# Altium PCB GSM.PcbDoc (part 1 of 2)
Units mm, origin at the board's own origin, x right, y up, seen from the top; angles counter-clockwise.
Board outline 52.5 x 130 mm, 2 copper layers (Top Layer, Bottom Layer); 68 components, 56 nets, 259 pads, 68 vias.
Unrouted connection lines stored in the file: 1.
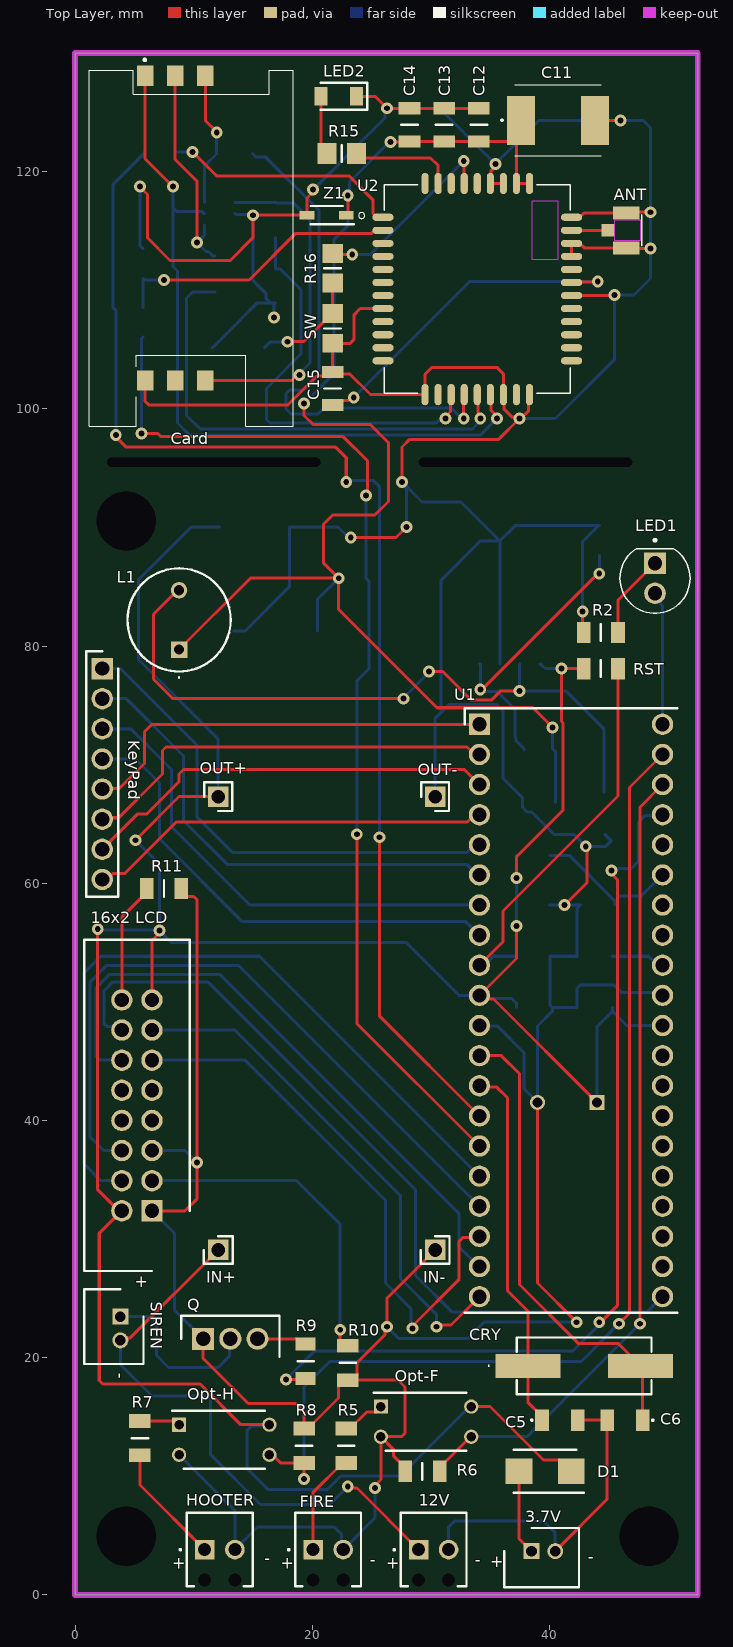
[diagram p0: Top Layer view]
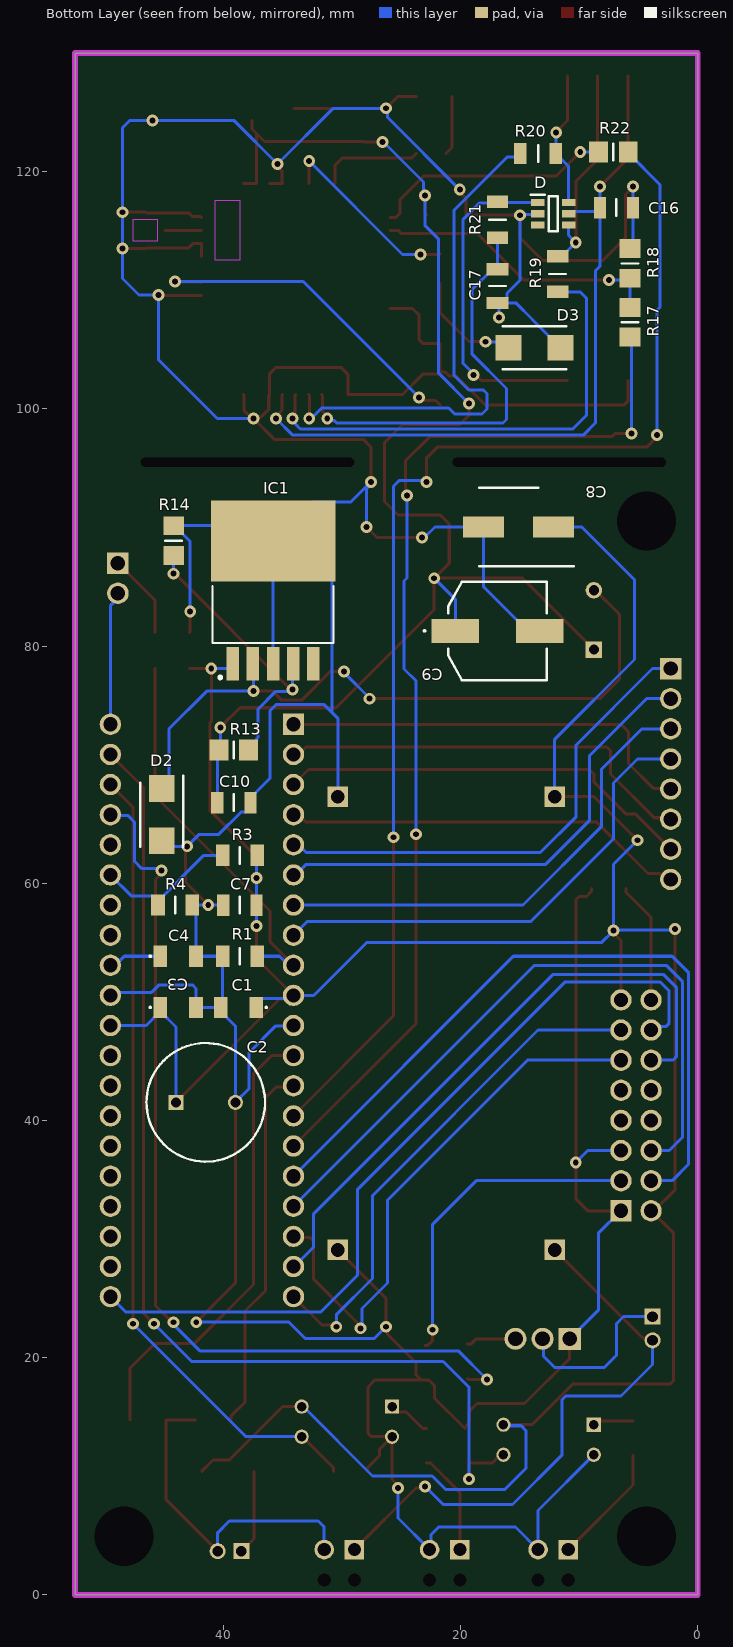
[diagram p1: Bottom Layer view, seen from below]

## Layer stack, top to bottom
Top Solder: solder mask 0.0102, Solder Resist, Dk 3.5
Top Layer: signal copper 0.0356
Dielectric 1: dielectric 0.32, FR-4, Dk 4.8
Bottom Layer: signal copper 0.0356
Bottom Solder: solder mask 0.0102, Solder Resist, Dk 3.5

## Board outline
0,0 52.5,0 52.5,130 0,130

## Design rules (kind name [scope] priority, off if disabled: settings)
Clearance [All] p1: gap=0.254 ignorepadtopadclearanceinfootprint=FALSE
PolygonConnect [All] p1: connectstyle=Relief reliefconductorwidth=0.254 reliefentries=4 polygonreliefangle="90 Angle" airgapwidth=0.254
RoutingVias [All] p1: holewidth=0.5 width=1 viastyle="Through Hole" minholewidth=0.5 minwidth=1 maxholewidth=0.5 maxwidth=1
SolderMaskExpansion [All] p1: expansion=0.102 istentingtop=FALSE
UnRoutedNet [All] p1: checkbadconnections=TRUE
Width [All] p1: maxlimit=0.254 minlimit=0.254 preferedwidth=0.254
29 further rules are at their usual default settings.

## Classes and differential pairs
component class "SIM800C SCH": ANT C7 C8 C9 C10 C11 C12 C13 C14 C15 C16 C17 Card D D2 IC1 L1 LED2 R13 R14 R15 R16 R17 R18 R19 R20 R21 R22 SW U2 Z1
component class "GSM SA Schematic": 3.7V 12V "16x2 LCD" C1 C2 C3 C4 C5 C6 CRY D1 FIRE HOOTER IN+ IN- KeyPad LED1 Opt-F Opt-H OUT+ OUT- Q R1 R2 R3 R4 R5 R6 R7 R8 R9 R10 R11 RST SIREN U1

## Components (designator, comment, footprint, x,y, rotation, side; value= is the part's Value field where it differs from the comment)
3.7V "440054-2" SHDR2W70P0X200_1X2_600X470X635P 38.481,3.683 r180 top
12V "1725656" 1725656 28.956,3.81 r0 top
"16x2 LCD" "70246-1602" SHDR16W99P254_2X8_2794X889X927P 6.477,32.385 r90 top
ANT "U.FL-R-SMT(01)" HRS_U.FL-R-SMT(01) 46.482,115.062 r270 top
C1 "100nF" C1206 38.735,49.53 r0 bottom
C2 "1000uF" CAPPRD500W65D1000H1750 43.989,41.529 r180 bottom
C3 "100nF" C1206 43.815,49.53 r180 bottom
C4 "0.1uF" C1206 43.815,53.848 r180 bottom
C5 "22pF" C1206 40.87,14.732 r0 top
C6 "22pF" C1206 46.355,14.732 r180 top
C7 "1uF" CAPC3216X127N 38.608,58.166 r0 bottom
C8 "100uF" CAPAE660X800N 15.113,90.043 r0 bottom
C9 "330uF" EEETC1V470P 16.891,81.28 r270 bottom
C10 "100uF" CAPC3216X127N 39.116,66.802 r180 bottom
C11 "100uF" T510E 40.712,124.333 r0 top
C12 "10uF" CAPC3216X127N 34.036,123.952 r270 top
C13 "33pF" CAPC3216X127N 31.115,123.952 r270 top
C14 "10pF" CAPC3216X127N 28.194,123.952 r270 top
C15 "4.7uF" CAPC3216X127N 21.717,101.727 r90 top
C16 "100nF" CAPC3216X127N 6.858,116.967 r180 bottom
C17 "22pF" CAPC3216X170N 16.891,110.363 r270 bottom
Card "009162006301150" 009162006301150 9.779,113.538 r270 top locked
CRY "16MHz" ECS160185PXGMTR 42.926,19.304 r0 top
D "ESDA6V1-5SC6" SOT95P280X145-6N 12.192,116.459 r180 bottom
D1 "ESD Diode" DIOM5336X262N 39.624,10.414 r180 top
D2 "MBRS360BT3G" DIOM5436X247N 45.212,65.786 r270 bottom
D3 "SMBJ36CA-TR" SMBJ50CA 13.757,105.156 r180 bottom
FIRE "1725656" 1725656 20.066,3.81 r0 top
HOOTER "1725656" 1725656 10.922,3.81 r0 top
IC1 "LM2596S-12_NOPB" TO170P1435X465-6N 35.814,84.709 r90 bottom
IN+ "5-146280-1" HDRV1W67P0X254_1X1_213X234X821P 12.065,29.083 r0 top locked
IN- "5-146280-1" HDRV1W67P0X254_1X1_213X234X821P 30.353,29.083 r0 top locked
KeyPad "87891-0808" HDRV8W69P0X254_1X8_2032X251X1641P 2.286,78.105 r270 top
L1 "100uH" RLH0912101KL 8.763,79.709 r90 top locked
LED1 "L08R5000Q1" LEDRD254W57D500H1070 48.895,85.725 r270 top
LED2 "150120GS75000" LEDC3214X78N 22.225,126.365 r180 top
Opt-F "EL817_C_-G" DIP762W60P254L458H480Q4N 29.591,14.605 r0 top
Opt-H "EL817_C_-G" DIP762W60P254L458H480Q4N 12.573,13.081 r0 top
OUT+ "5-146280-1" HDRV1W67P0X254_1X1_213X234X821P 12.065,67.31 r90 top locked
OUT- "5-146280-1" HDRV1W67P0X254_1X1_213X234X821P 30.353,67.31 r90 top locked
Q "BD13510STU" TO229P345X800X1460-3P 10.795,21.59 r0 top
R1 "10K" RESC3216X65N 38.608,53.848 r0 bottom
R2 "330ohm" RESC3216X65N 44.323,81.153 r180 top
R3 "100K" RESC3216X65N 38.608,62.357 r0 bottom
R4 "47K" RESC3216X65N 44.069,58.166 r180 bottom
R5 "10K" RESC3216X65N 22.86,12.573 r90 top
R6 "4.7K" RESC3216X65N 29.284,10.414 r180 top
R7 "10K" RESC3216X65N 5.461,13.208 r90 top
R8 "4.7K" RESC3216X65N 19.304,12.573 r90 top
R9 "1K" RESC3116X65N 19.431,19.685 r90 top
R10 "2.2K" RESC3216X65N 22.987,19.558 r270 top
R11 "220ohm" RESC3216X65N 7.493,59.563 r0 top
R13 "2.2K" RESC3216X51N 39.116,71.247 r180 bottom
R14 "1K" RESC3216X51N 44.196,88.9 r90 bottom
R15 "180ohm" RESC3216X51N 22.479,121.539 r0 top
R16 "100ohm" RESC3216X51N 21.717,111.867 r270 top
R17 "1K" RESC3216X51N 5.715,107.315 r90 bottom
R18 "2.2K" RESC3216X51N 5.715,112.268 r90 bottom
R19 "51ohm" RESC3216X60N 11.811,111.379 r90 bottom
R20 "51ohm" RESC3216X60N 13.462,121.539 r180 bottom
R21 "51ohm" RESC3216X60N 16.891,115.951 r270 bottom
R22 "1K" RESC3216X51N 7.112,121.666 r180 bottom
RST "NP" RESC3216X65N 44.323,78.105 r0 top
SIREN "440054-2" SHDR2W70P0X200_1X2_600X470X635P 3.81,23.463 r90 top
SW "PHPA1206E1001BST1" RESC3216X51N 21.717,106.787 r270 top
U1 "1-2199299-5" DIPS1544W70P254L5080H530Q40N 34.09,73.406 r0 top locked
U2 "SIM800C" LCC110P1570X1760X250-42N 33.909,110.109 r0 top locked
Z1 "5.1V 500mW" SOD3716X135N 21.209,116.332 r180 top

## Footprints (in the part's own frame and the unit in brackets; to place one, negate y for a bottom-side part, rotate by r counter-clockwise, add the part's x,y. Pads: shape width x height; smd on the part's side, far side on the other; paste and mask are expansions set on the pad)
1725656 [mm]
  rect 1.65x1.65 hole 1.1: 1(0,0)
  round 1.65 hole 1.1: 2(2.54,0)
  round 0.55 hole 1.1 unplated: MH1(0,-2.54) MH2(2.54,-2.54)
  silkscreen extent -2.1,-3.1 4.04,3.1, body extent -1.5,-3.1 4.04,3.1, height 9
009162006301150 [mm]
  rect 1.7x1.4 smd: 1(-14.55,-3.88) 2(-14.55,-1.34) 3(-14.55,1.2) 5(11.15,-3.88) 6(11.15,-1.34) 7(11.15,1.2)
  silkscreen extent -16,-8.6 15,8.6, body extent -15.02,-8.6 14.98,8.6, height 2.6
C1206 [mm]
  rect 1.15x1.8 smd: 1(-1.5,0) 2(1.5,0)
  silkscreen extent -2.4,-0.05 -2.3,0.05, body extent -1.7,-0.9 1.7,0.9, height 1.75
CAPAE660X800N [mm]
  rect 3.45x1.8 smd: 1(-2.95,0) 2(2.95,0)
  silkscreen extent -4.67,-3.3 3.3,3.3, body extent -3.8,-3.4 3.8,3.4, height 8.01
CAPC3216X127N [mm]
  rect 1.02x1.82 smd: 1(-1.4,0) 2(1.4,0)
  silkscreen extent 0,-0.7 0,0.7, body extent -1.6,-0.8 1.6,0.8, height 1.27
CAPC3216X170N [mm]
  rect 1.03x1.87 smd: 1(-1.42,0) 2(1.42,0)
  silkscreen extent 0,-0.7 0,0.7, body extent -1.6,-0.8 1.6,0.8, height 1.7
CAPPRD500W65D1000H1750 [mm]
  rect 1.275x1.275 hole 0.85: 1(0,0)
  round 1.275 hole 0.85: 2(5,0)
  silkscreen extent -2.5,-5 7.5,5, body extent -2.75,-5.25 7.75,5.25, height 17.5
DIOM5336X262N [mm]
  rect 2.25x2.15 smd: 1(-2.2,0) 2(2.2,0)
  silkscreen extent -3.27,-1.81 2.65,1.81, body extent -2.65,-1.81 2.65,1.81, height 2.62
DIOM5436X247N [mm]
  rect 2.25x2.15 smd: 1(-2.2,0) 2(2.2,0)
  silkscreen extent -3.27,-1.81 2.7,1.81, body extent -2.7,-1.81 2.7,1.81, height 2.47
DIP762W60P254L458H480Q4N [mm]
  rect 1.2x1.2 hole 0.8: 1(-3.81,1.27)
  round 1.2 hole 0.8: 2(-3.81,-1.27) 3(3.81,-1.27) 4(3.81,1.27)
  silkscreen extent -4.41,-2.44 3.4,2.44, body extent -3.96,-2.29 3.96,2.29, height 4.8
DIPS1544W70P254L5080H530Q40N [mm]
  rect 1.8x1.8 hole 1.2: 1(0,0)
  round 1.8 hole 1.2: 2(0,-2.54) 3(0,-5.08) 4(0,-7.62) 5(0,-10.16) 6(0,-12.7) 7(0,-15.24) 8(0,-17.78) 9(0,-20.32) 10(0,-22.86) 11(0,-25.4) 12(0,-27.94) 13(0,-30.48) 14(0,-33.02) 15(0,-35.56) 16(0,-38.1) 17(0,-40.64) 18(0,-43.18) 19(0,-45.72) 20(0,-48.26) 21(15.44,-48.26) 22(15.44,-45.72) 23(15.44,-43.18) 24(15.44,-40.64) 25(15.44,-38.1) 26(15.44,-35.56) 27(15.44,-33.02) 28(15.44,-30.48) 29(15.44,-27.94) 30(15.44,-25.4) 31(15.44,-22.86) 32(15.44,-20.32) 33(15.44,-17.78) 34(15.44,-15.24) 35(15.44,-12.7) 36(15.44,-10.16) 37(15.44,-7.62) 38(15.44,-5.08) 39(15.44,-2.54) 40(15.44,0)
  silkscreen extent -1.23,-49.63 16.67,1.37, body extent -1.13,-49.53 16.57,1.27, height 5
ECS160185PXGMTR [mm]
  rect 5.5x2 smd: 1(-4.75,0) 2(4.75,0)
  silkscreen extent -8.1,-2.4 5.68,2.4, body extent -7.3,-2.4 7.3,2.4, height 4.4
EEETC1V470P [mm]
  rect 2x4 smd: 1(0,-3.55) 2(0,3.55)
  silkscreen extent -4.15,-6.2 4.15,4.15, body extent 0,0 0,0
HDRV1W67P0X254_1X1_213X234X821P [mm]
  rect 1.725x1.725 / inner round 1.725 / far side rect 1.725x1.725 hole 1.15: 1(0,0)
  silkscreen extent -1.21,-1.17 1.21,1.17
HDRV8W69P0X254_1X8_2032X251X1641P [mm]
  rect 1.8x1.8 hole 1.2: 1(0,0)
  round 1.8 hole 1.2: 2(2.54,0) 3(5.08,0) 4(7.62,0) 5(10.16,0) 6(12.7,0) 7(15.24,0) 8(17.78,0)
  silkscreen extent -1.46,-1.36 19.24,1.36, body extent -1.27,-1.25 19.05,1.25, height 16.41
HRS_U.FL-R-SMT(01) [mm]
  rect 1.1x2.25 smd: 1(-1.475,0) 2(1.475,0)
  rect 1.05x1.1 smd: 3(0,-1.55)
  Keep-Out Layer region: 0.9,-0.963 -0.903,-0.963 -0.903,1.15 0.9,1.15
  silkscreen extent -1.3,1.3 1.3,1.3, body extent -1.5,-1.55 1.5,1.55, height 1.25
LCC110P1570X1760X250-42N [mm]
  oval 1.8x0.6 smd: 1(-7.95,6.05) 2(-7.95,4.95) 3(-7.95,3.85) 4(-7.95,2.75) 5(-7.95,1.65) 6(-7.95,0.55) 7(-7.95,-0.55) 8(-7.95,-1.65) 9(-7.95,-2.75) 10(-7.95,-3.85) 11(-7.95,-4.95) 12(-7.95,-6.05) 22(7.95,-6.05) 23(7.95,-4.95) 24(7.95,-3.85) 25(7.95,-2.75) 26(7.95,-1.65) 27(7.95,-0.55) 28(7.95,0.55) 29(7.95,1.65) 30(7.95,2.75) 31(7.95,3.85) 32(7.95,4.95) 33(7.95,6.05)
  oval 0.6x1.8 smd: 13(-4.4,-8.9) 14(-3.3,-8.9) 15(-2.2,-8.9) 16(-1.1,-8.9) 17(0,-8.9) 18(1.1,-8.9) 19(2.2,-8.9) 20(3.3,-8.9) 21(4.4,-8.9) 34(4.4,8.9) 35(3.3,8.9) 36(2.2,8.9) 37(1.1,8.9) 38(0,8.9) 39(-1.1,8.9) 40(-2.2,8.9) 41(-3.3,8.9) 42(-4.4,8.9)
  Keep-Out Layer region: 6.8,2.483 4.656,2.483 4.656,7.43 6.8,7.43
  silkscreen extent -10,-8.8 7.85,8.8, body extent -7.85,-8.8 7.85,8.8, height 2.5
LEDC3214X78N [mm]
  rect 1.1x1.55 smd: 1(-1.5,0) 2(1.5,0)
  silkscreen extent -2.4,-1.12 1.5,1.12, body extent -1.6,-0.8 1.6,0.8, height 0.68
LEDRD254W57D500H1070 [mm]
  round 1.815 hole 1.21: A(1.27,0)
  rect 1.815x1.815 / inner round 1.815 / far side rect 1.815x1.815 hole 1.21: C(-1.27,0)
  silkscreen extent -3.3,-2.96 2.96,2.96, body extent -2.6,-2.95 2.95,2.95, height 9.1
RESC3116X65N [mm]
  rect 1.1x1.7 smd: 1(-1.45,0) 2(1.45,0)
  silkscreen extent 0,-0.67 0,0.67
RESC3216X51N [mm]
  rect 1.6x1.75 smd: 1(-1.25,0) 2(1.25,0)
  silkscreen extent 0,-0.7 0,0.7, body extent -1.6,-0.8 1.6,0.8, height 0.51
RESC3216X60N [mm]
  rect 1.05x1.8 smd: 1(-1.5,0) 2(1.5,0)
  silkscreen extent 0,-0.7 0,0.7, body extent -1.42,-0.74 1.78,0.86, height 0.55
RESC3216X65N [mm]
  rect 1.15x1.8 smd: 1(-1.45,0) 2(1.45,0)
  silkscreen extent 0,-0.7 0,0.7, body extent -1.58,-0.8 1.58,0.8, height 0.65
RLH0912101KL [mm]
  rect 1.381x1.381 hole 0.85: 1(0,0)
  round 1.381 hole 0.85: 2(5,0)
  silkscreen extent -2.4,-4.35 6.85,4.35, body extent -1.85,-4.35 6.85,4.35, height 11.1
SHDR2W70P0X200_1X2_600X470X635P [mm]
  rect 1.35x1.35 hole 0.9: 1(0,0)
  round 1.35 hole 0.9: 2(-2,0)
  silkscreen extent -4,-1.95 2.3,3.05, body extent -4.02,-1.54 1.98,3.16, height 6.05
SHDR16W99P254_2X8_2794X889X927P [mm]
  rect 1.8x1.8 / inner round 1.8 / far side rect 1.8x1.8 hole 1.2: 1(0,0)
  round 1.8 hole 1.2: 2(0,2.54) 3(2.54,0) 4(2.54,2.54) 5(5.08,0) 6(5.08,2.54) 7(7.62,0) 8(7.62,2.54) 9(10.16,0) 10(10.16,2.54) 11(12.7,0) 12(12.7,2.54) 13(15.24,0) 14(15.24,2.54) 15(17.78,0) 16(17.78,2.54)
  silkscreen extent -5.08,-3.17 22.86,5.72
SMBJ50CA [mm]
  rect 2.2x2.15 smd: 1(-2.2,0) 2(2.2,0)
  silkscreen extent -2.68,-1.81 2.68,1.81, body extent -2.8,-1.97 2.8,1.97, height 2.65
SOD3716X135N [mm]
  rect 1.25x0.75 smd: 1(-1.65,0) 2(1.65,0)
  silkscreen extent -2.27,-0.77 1.35,0.77, body extent -1.85,-0.77 1.85,0.77, height 1.35
SOT95P280X145-6N [mm]
  rect 1.15x0.6 smd: 1(-1.3,0.95) 2(-1.3,0) 3(-1.3,-0.95) 4(1.3,-0.95) 5(1.3,0) 6(1.3,0.95)
  silkscreen extent -1.88,-1.46 0.38,1.6, body extent -1.4,-1.46 1.4,1.46, height 1.45
T510E [mm]
  rect 2.37x4.13 smd: 1(-3.12,0) 2(3.12,0)
  silkscreen extent -4.77,-3 3.65,3, body extent -3.8,-3.15 3.8,3.15, height 3.8
TO170P1435X465-6N [mm]
  rect 2.8x1.05 smd: 1(-6.2,3.4) 2(-6.2,1.7) 3(-6.2,0) 4(-6.2,-1.7) 5(-6.2,-3.4)
  rect 6.85x10.5 smd: 6(4.15,0)
  silkscreen extent -7.47,-5.1 0.35,5.1, body extent -7.16,-5.08 7.14,5.08, height 4.72
TO229P345X800X1460-3P [mm]
  rect 1.86x1.86 hole 1.24: 1(0,0)
  round 1.86 hole 1.24: 2(2.29,0) 3(4.58,0)
  silkscreen extent -1.86,-1.5 6.44,1.95, body extent -1.71,-1.5 6.29,1.95, height 14.2

## Part data
3.7V SIREN: "Connector", Manufacturer_Name="TE Connectivity", Mouser Part Number=571-440054-2, Arrow Part Number=440054-2, Arrow Price/Stock=https://www.arrow.com/en/products/440054-2/te-connectivity?region=europe, Datasheet Link=https://www.te.com/commerce/DocumentDelivery/DDEController?Action=showdoc&DocId=Customer+Drawing%7F440054%7FF8%7Fpdf%7FEnglish%7FENG_CD_440054_F8.pdf%7F1-440054-2, Height=6.35mm, Manufacturer_Part_Number=440054-2, Mouser Price/Stock=https://www.mouser.co.uk/ProductDetail/TE-Connectivity/440054-2?qs=JFPmFzpscO4RQaczYEA68w%3D%3D
12V FIRE HOOTER: "Connector", Manufacturer_Name="Phoenix Contact", Mouser Part Number=651-1725656, Arrow Part Number=1725656, Arrow Price/Stock=https://www.arrow.com/en/products/1725656/phoenix-contact?region=nac, Datasheet Link=https://www.phoenixcontact.com/online/portal/us/?uri=pxc-oc-itemdetail:pid=1725656&library=usen&pcck=P-11-01-05&tab=1&selectedCategory=ALL, Height=8.65mm, Manufacturer_Part_Number=1725656, Mouser Price/Stock=https://www.mouser.co.uk/ProductDetail/Phoenix-Contact/1725656?qs=Ul7CXFMnlWWQeccayYbRmw%3D%3D
"16x2 LCD": "Headers & Wire Housings 2.54mm CGrid Hdr Shr d /Slt .76AuLF 16Ckt", Manufacturer_Name=Molex, Mouser Part Number=538-70246-1602, Datasheet Link=https://www.molex.com/pdm_docs/sd/702461602_sd.pdf, Geometry.Height=9.27mm, Manufacturer_Part_Number=70246-1602, Mouser Price/Stock=https://www.mouser.co.uk/ProductDetail/Molex/70246-1602?qs=Y%2FrI5Y8Al89vLxTpaytoaQ%3D%3D
ANT: "U.FL (UMCC) Connector Receptacle, Male Pin 50Ohm Surface Mount Solder. RF Connectors / Coaxial Connectors", Package=None, Availability="In Stock", Check_prices=https://www.snapeda.com/parts/U.FL-R-SMT(01)/Hirose+Electric+Co+Ltd/view-part/?ref=eda, MF=Hirose, MP=U.FL-R-SMT(01), Price=None, Purchase-URL=https://pricing.snapeda.com/search/part/U.FL-R-SMT(01)/?ref=eda, SnapEDA_Link=https://www.snapeda.com/parts/U.FL-R-SMT(01)/Hirose+Electric+Co+Ltd/view-part/?ref=snap
C1 C3: library part C1206C150F5GACTU, "100nF 5% tolerance 50VDC Capacitor", Manufacturer_Name=KEMET, Mouser Part Number=80-C1206C150F5GACTU, Datasheet Link=https://content.kemet.com/datasheets/KEM_C1003_C0G_SMD.pdf, Manufacturer_Part_Number=C1206C150F5GACTU, Mouser Price/Stock=https://www.mouser.co.uk/ProductDetail/KEMET/C1206C150F5GACTU?qs=ds50AKTGxA8Yi2FrC9bQqw%3D%3D
C2: library part EEU-HD1E102B, "1000uF 25VDC Capacitor Polarised", Manufacturer_Name=Panasonic, Mouser Part Number=667-EEU-HD1E102B, Arrow Part Number=EEU-HD1E102B, Arrow Price/Stock=https://www.arrow.com/en/products/eeu-hd1e102b/panasonic, Datasheet Link=http://industrial.panasonic.com/cdbs/www-data/pdf/RDF0000/ABA0000C1035.pdf, Height=17.5mm, Manufacturer_Part_Number=EEU-HD1E102B, Mouser Price/Stock=https://www.mouser.com/Search/Refine.aspx?Keyword=667-EEU-HD1E102B
C4: library part C1206C150F5GACTU, "0.1uF 5% tolerance 50VDC Capacitor", Manufacturer_Name=KEMET, Mouser Part Number=80-C1206C150F5GACTU, Datasheet Link=https://content.kemet.com/datasheets/KEM_C1003_C0G_SMD.pdf, Manufacturer_Part_Number=C1206C150F5GACTU, Mouser Price/Stock=https://www.mouser.co.uk/ProductDetail/KEMET/C1206C150F5GACTU?qs=ds50AKTGxA8Yi2FrC9bQqw%3D%3D
C5 C6: library part C1206C150F5GACTU, "22pF 10% tolerance 50VDC tolerance Capacitor", Manufacturer_Name=KEMET, Mouser Part Number=80-C1206C150F5GACTU, Datasheet Link=https://content.kemet.com/datasheets/KEM_C1003_C0G_SMD.pdf, Manufacturer_Part_Number=C1206C150F5GACTU, Mouser Price/Stock=https://www.mouser.co.uk/ProductDetail/KEMET/C1206C150F5GACTU?qs=ds50AKTGxA8Yi2FrC9bQqw%3D%3D
C7 C15: library part 1206YC105JAT2A, "Capacitor", Manufacturer_Name=AVX, Mouser Part Number=581-1206YC105J, Arrow Part Number=1206YC105JAT2A, Arrow Price/Stock=https://www.arrow.com/en/products/1206yc105jat2a/avx, Datasheet Link=https://spicat.kyocera-avx.com/product/mlcc/chartview/1206YC105JAT2A/DataSheet/X7R, Height=1.27mm, Manufacturer_Part_Number=1206YC105JAT2A, Mouser Price/Stock=https://www.mouser.com/Search/Refine.aspx?Keyword=581-1206YC105J
C8: library part EEV107M025A9HAA, "100uF 25VDC 20% Capacitor Polarised", Manufacturer_Name=KEMET, Mouser Part Number=80-EEV107M025A9HAA, Arrow Part Number=EEV107M025A9HAA, Arrow Price/Stock=https://www.arrow.com/en/products/eev107m025a9haa/kemet-corporation?region=nac, Datasheet Link=https://content.kemet.com/datasheets/KEM_A4002_EEV.pdf, Height=8mm, Manufacturer_Part_Number=EEV107M025A9HAA, Mouser Price/Stock=https://www.mouser.co.uk/ProductDetail/KEMET/EEV107M025A9HAA?qs=T9vdlufmP8y%2FxeVsq9Rq6w%3D%3D
C9: library part EEE-FH1E331UL, "330uF 20% tolerance 25VDC Capacitor Polarised", Manufacturer_Name=Panasonic, Datasheet Link=https://industrial.panasonic.com/cdbs/www-data/pdf/RDE0000/ast-ind-166561.pdf, Manufacturer_Part_Number=EEE-FH1E331UL
C10: library part 1206YC105JAT2A, "100uF 10% tolerance 10VDC Capacitor", Manufacturer_Name=AVX, Mouser Part Number=581-1206YC105J, Arrow Part Number=1206YC105JAT2A, Arrow Price/Stock=https://www.arrow.com/en/products/1206yc105jat2a/avx, Datasheet Link=https://spicat.kyocera-avx.com/product/mlcc/chartview/1206YC105JAT2A/DataSheet/X7R, Height=1.27mm, Manufacturer_Part_Number=1206YC105JAT2A, Mouser Price/Stock=https://www.mouser.com/Search/Refine.aspx?Keyword=581-1206YC105J
C11: library part T510E107M025ATE050, "100uF 25VDC Capacitor Polarised", Manufacturer_Name=KEMET, Mouser Part Number=80-T510E107M025, Arrow Part Number=T510E107M025ATE050, Arrow Price/Stock=https://www.arrow.com/en/products/t510e107m025ate050/kemet-corporation?region=nac, Datasheet Link=https://content.kemet.com/datasheets/KEM_T2014_T510.pdf, Height=4.3mm, Manufacturer_Part_Number=T510E107M025ATE050, Mouser Price/Stock=https://www.mouser.co.uk/ProductDetail/KEMET/T510E107M025ATE050?qs=WjQheL5Mt%2FDzPcz8%252Buuowg%3D%3D
C12: library part 1206YC105JAT2A, "10uF 25VDC Capacitor", Manufacturer_Name=AVX, Mouser Part Number=581-1206YC105J, Arrow Part Number=1206YC105JAT2A, Arrow Price/Stock=https://www.arrow.com/en/products/1206yc105jat2a/avx, Datasheet Link=https://spicat.kyocera-avx.com/product/mlcc/chartview/1206YC105JAT2A/DataSheet/X7R, Height=1.27mm, Manufacturer_Part_Number=1206YC105JAT2A, Mouser Price/Stock=https://www.mouser.com/Search/Refine.aspx?Keyword=581-1206YC105J
C13: library part 1206YC105JAT2A, "33pF 50VDC Capacitor", Manufacturer_Name=AVX, Mouser Part Number=581-1206YC105J, Arrow Part Number=1206YC105JAT2A, Arrow Price/Stock=https://www.arrow.com/en/products/1206yc105jat2a/avx, Datasheet Link=https://spicat.kyocera-avx.com/product/mlcc/chartview/1206YC105JAT2A/DataSheet/X7R, Height=1.27mm, Manufacturer_Part_Number=1206YC105JAT2A, Mouser Price/Stock=https://www.mouser.com/Search/Refine.aspx?Keyword=581-1206YC105J
C14: library part 1206YC105JAT2A, "10pF 50VDC Capacitor", Manufacturer_Name=AVX, Mouser Part Number=581-1206YC105J, Arrow Part Number=1206YC105JAT2A, Arrow Price/Stock=https://www.arrow.com/en/products/1206yc105jat2a/avx, Datasheet Link=https://spicat.kyocera-avx.com/product/mlcc/chartview/1206YC105JAT2A/DataSheet/X7R, Height=1.27mm, Manufacturer_Part_Number=1206YC105JAT2A, Mouser Price/Stock=https://www.mouser.com/Search/Refine.aspx?Keyword=581-1206YC105J
C16: library part 1206YC105JAT2A, "100nF 10% tolerance 50VDC Capacitor", Manufacturer_Name=AVX, Mouser Part Number=581-1206YC105J, Arrow Part Number=1206YC105JAT2A, Arrow Price/Stock=https://www.arrow.com/en/products/1206yc105jat2a/avx, Datasheet Link=https://spicat.kyocera-avx.com/product/mlcc/chartview/1206YC105JAT2A/DataSheet/X7R, Height=1.27mm, Manufacturer_Part_Number=1206YC105JAT2A, Mouser Price/Stock=https://www.mouser.com/Search/Refine.aspx?Keyword=581-1206YC105J
C17: library part VJ1206A220JXGAT5Z, "22pF 10% tolerance 50VDC tolerance Capacitor", Manufacturer_Name=Vishay, Mouser Part Number=77-VJ1206A220JXGAT5Z, Datasheet Link=http://www.vishay.com/docs/45200/vjhirelseries.pdf, Height=1.7mm, Manufacturer_Part_Number=VJ1206A220JXGAT5Z, Mouser Price/Stock=https://www.mouser.co.uk/ProductDetail/Vishay-Vitramon/VJ1206A220JXGAT5Z?qs=UulECF1yA9GP5yydc6Uoow%3D%3D
Card: "Connector", Manufacturer_Name=AVX, Mouser Part Number=581-009162006301150, Arrow Part Number=009162006301150, Arrow Price/Stock=https://www.arrow.com/en/products/009162006301150/avx, Datasheet Link=http://datasheets.avx.com/LockingSIM_9162-300.pdf, Height=2.5mm, Manufacturer_Part_Number=009162006301150, Mouser Price/Stock=https://www.mouser.co.uk/ProductDetail/AVX/009162006301150?qs=3oXjESXZBsBVgHb8Ltya2A%3D%3D
CRY: library part ECS-160-18-5PX-GM-TR, "Crystal or Oscillator", Manufacturer_Name=ECS, Mouser Part Number=520-160-18-5PX-GM-TR, Datasheet Link=https://www.mouser.com/datasheet/2/122/csm_7x-1841291.pdf, Height=4.3mm, Manufacturer_Part_Number=ECS-160-18-5PX-GM-TR, Mouser Price/Stock=https://www.mouser.co.uk/ProductDetail/ECS/ECS-160-18-5PX-GM-TR?qs=amGC7iS6iy9jy4CztfLIlw%3D%3D
D: "Integrated Circuit", Manufacturer_Name=STMicroelectronics, Mouser Part Number=511-ESDA6V1-5SC6, Arrow Part Number=ESDA6V1-5SC6, Arrow Price/Stock=https://www.arrow.com/en/products/esda6v1-5sc6/stmicroelectronics?region=nac, Datasheet Link=http://www.st.com/st-web-ui/static/active/en/resource/technical/document/datasheet/CD00005102.pdf, Height=1.45mm, Manufacturer_Part_Number=ESDA6V1-5SC6, Mouser Price/Stock=https://www.mouser.co.uk/ProductDetail/STMicroelectronics/ESDA6V1-5SC6?qs=ZN9SVtODT3yxqNpCUKP6Bg%3D%3D
D1: library part SMBJ5.0CA-13-F, "ESD Suppressors / TVS Diodes 600W 5.0V", Manufacturer_Name="Diodes Incorporated", Mouser Part Number=621-SMBJ5.0CA-13-F, Arrow Part Number=SMBJ5.0CA-13-F, Arrow Price/Stock=https://www.arrow.com/en/products/smbj5.0ca-13-f/diodes-incorporated?region=nac, Datasheet Link=http://uk.rs-online.com/web/p/products/1222405, Height=2.62mm, Manufacturer_Part_Number=SMBJ5.0CA-13-F, Mouser Price/Stock=https://www.mouser.co.uk/ProductDetail/Diodes-Incorporated/SMBJ5.0CA-13-F?qs=gaDBXWSqsDAkxXz1%252BnNiVg%3D%3D
D2: "Schottky Diodes & Rectifiers 60V,Schottky,SMA,3A", Manufacturer_Name=onsemi, Mouser Part Number=863-MBRS360BT3G, Arrow Part Number=MBRS360BT3G, Arrow Price/Stock=https://www.arrow.com/en/products/mbrs360bt3g/on-semiconductor, Datasheet Link=http://www.onsemi.com/pub/Collateral/MBRS360T3-D.PDF, Height=2.47mm, Manufacturer_Part_Number=MBRS360BT3G, Mouser Price/Stock=https://www.mouser.co.uk/ProductDetail/onsemi/MBRS360BT3G?qs=S9Eyls9TyKbavyAAp37J%252Bg%3D%3D
D3: "TVS Diode (Bi-directional) - SMBJ22A", Manufacturer_Name=STMicroelectronics, Mouser Part Number=511-SMBJ36CA-TR, Arrow Part Number=SMBJ36CA-TR, Arrow Price/Stock=https://www.arrow.com/en/products/smbj36ca-tr/stmicroelectronics?region=europe, Datasheet Link=http://uk.rs-online.com/web/p/products/7958492, Height=2.65mm, Manufacturer_Part_Number=SMBJ36CA-TR, Mouser Price/Stock=https://www.mouser.co.uk/ProductDetail/STMicroelectronics/SMBJ36CA-TR?qs=SoAZXCQuyY%252BvVRKvkB14ug%3D%3D
IC1: "Integrated Circuit", Arrow Part Number=LM2596S-12/NOPB, Manufacturer_Name="Texas Instruments", Mouser Part Number=926-LM2596S-12/NOPB, Arrow Price/Stock=https://www.arrow.com/en/products/lm2596s-12nopb/texas-instruments?region=nac, Datasheet Link=http://www.ti.com/lit/ds/symlink/lm2596.pdf, Height=4.65mm, Manufacturer_Part_Number=LM2596S-12/NOPB, Mouser Price/Stock=https://www.mouser.co.uk/ProductDetail/Texas-Instruments/LM2596S-12-NOPB?qs=X1J7HmVL2ZF8LB%2FmfveaIg%3D%3D
IN+ IN- OUT+ OUT-: "AMP - TE CONNECTIVITY - 5-146280-1 - 01 MODII HDR SRST B/A LF", Manufacturer_Name="TE Connectivity", Mouser Part Number=571-51462801, Datasheet Link=https://www.te.com/commerce/DocumentDelivery/DDEController?Action=showdoc&DocId=Customer+Drawing%7F146280%7FH2%7Fpdf%7FEnglish%7FENG_CD_146280_H2.pdf%7F5-146280-1, Geometry.Height=8.21mm, Manufacturer_Part_Number=5-146280-1, Mouser Price/Stock=https://www.mouser.co.uk/ProductDetail/TE-Connectivity/5-146280-1?qs=bwpFY26eRVcArW7BMMLddw%3D%3D
KeyPad: "Connector", Manufacturer_Name=Molex, Mouser Part Number=538-87891-0808, Datasheet Link=https://www.molex.com/pdm_docs/sd/878910808_sd.pdf, Height=16.41mm, Manufacturer_Part_Number=87891-0808, Mouser Price/Stock=https://www.mouser.co.uk/ProductDetail/Molex/87891-0808?qs=iLbezkQI%252Bsh%252BavKMBAJgwA%3D%3D
L1: library part RLH0912-101KL, "100uH 10% tolerance 900mA Inductor", Manufacturer_Name=Bourns, Mouser Part Number=652-RLH0912-101KL, Datasheet Link=https://www.google.com/url?sa=t&rct=j&q=&esrc=s&source=web&cd=&ved=2ahUKEwjz1aCsps70AhWJ3oUKHQXqBgMQFnoECA0QAQ&url=https%3A%2F%2Fwww.bourns.com%2Fpdfs%2Frlb.pdf&usg=AOvVaw0e0GPLRrDgk_KnlxXDz6FJ, Height=11mm, Manufacturer_Part_Number=RLH0912-101KL, Mouser Price/Stock=https://www.mouser.co.uk/ProductDetail/Bourns/RLH0912-101KL?qs=SUrgTEU5cSrf3ut5JjToyw%3D%3D
LED1: "LED, 5MM, ORANGE; LED / Lamp Size: 5mm / T-1 3/4; LED Colour: Orange; Typ Luminous Intensity: 4.3mcd; Viewing Angle: ...", Package=None, Availability="In Stock", Check_prices=https://www.snapeda.com/parts/L08R5000Q1/LED+Technology/view-part/?ref=eda, MF="LED Technology", MP=L08R5000Q1, Price=None, SnapEDA_Link=https://www.snapeda.com/parts/L08R5000Q1/LED+Technology/view-part/?ref=snap
LED2: "LED", Manufacturer_Name="Wurth Elektronik", Mouser Part Number=710-150120GS75000, Height=0.78mm, Manufacturer_Part_Number=150120GS75000, Mouser Price/Stock=https://www.mouser.co.uk/ProductDetail/Wurth-Elektronik/150120GS75000?qs=LlUlMxKIyB3I3AMxrmBw4A%3D%3D
Opt-F Opt-H: "Integrated Circuit", Arrow Part Number=EL817(C)-G, Manufacturer_Name=Everlight, Mouser Part Number=638-EL817C-G, Arrow Price/Stock=https://www.arrow.com/en/products/el817-c-g/everlight-electronics?region=nac, Datasheet Link=https://componentsearchengine.com/Datasheets/1/EL817(C)-G.pdf, Height=4.8mm, Manufacturer_Part_Number=EL817(C)-G, Mouser Price/Stock=https://www.mouser.co.uk/ProductDetail/Everlight/EL817C-G?qs=8PzhAHr7IdMbkL15850MTg%3D%3D
Q: "Transistor BJT NPN", Manufacturer_Name=onsemi, Mouser Part Number=512-BD13510STU, Arrow Part Number=BD13510STU, Arrow Price/Stock=https://www.arrow.com/en/products/bd13510stu/on-semiconductor?region=nac, Datasheet Link=https://datasheet.datasheetarchive.com/originals/distributors/Datasheets_SAMA/6000e099be6481169b0ff4f49553d5da.pdf, Height=3.45mm, Manufacturer_Part_Number=BD13510STU, Mouser Price/Stock=https://www.mouser.co.uk/ProductDetail/onsemi-Fairchild/BD13510STU?qs=XVly9zr84oIAutVRL%2FrhQQ%3D%3D
R1 R5 R7: library part TNPW12065K00BEEN, "10K 1% tolerance Resistor", Manufacturer_Name=Vishay, Mouser Part Number=71-TNPW12065K00BEEN, Datasheet Link=https://www.mouser.co.uk/ProductDetail/Vishay-Dale/TNPW12065K00BEEN/?qs=jYh4YNbhoK0CHBzi35%2Fb3A%3D%3D, Height=0.65mm, Manufacturer_Part_Number=TNPW12065K00BEEN, Mouser Price/Stock=https://www.mouser.co.uk/ProductDetail/Vishay-Dale/TNPW12065K00BEEN/?qs=jYh4YNbhoK0CHBzi35%2Fb3A%3D%3D
R2: library part TNPW12065K00BEEN, "330ohm 1% Tolerance Resistor", Manufacturer_Name=Vishay, Mouser Part Number=71-TNPW12065K00BEEN, Datasheet Link=https://www.mouser.co.uk/ProductDetail/Vishay-Dale/TNPW12065K00BEEN/?qs=jYh4YNbhoK0CHBzi35%2Fb3A%3D%3D, Height=0.65mm, Manufacturer_Part_Number=TNPW12065K00BEEN, Mouser Price/Stock=https://www.mouser.co.uk/ProductDetail/Vishay-Dale/TNPW12065K00BEEN/?qs=jYh4YNbhoK0CHBzi35%2Fb3A%3D%3D
R3: library part TNPW12065K00BEEN, "100K 1% tolerance Resistor", Manufacturer_Name=Vishay, Mouser Part Number=71-TNPW12065K00BEEN, Datasheet Link=https://www.mouser.co.uk/ProductDetail/Vishay-Dale/TNPW12065K00BEEN/?qs=jYh4YNbhoK0CHBzi35%2Fb3A%3D%3D, Height=0.65mm, Manufacturer_Part_Number=TNPW12065K00BEEN, Mouser Price/Stock=https://www.mouser.co.uk/ProductDetail/Vishay-Dale/TNPW12065K00BEEN/?qs=jYh4YNbhoK0CHBzi35%2Fb3A%3D%3D
R4: library part TNPW12065K00BEEN, "47K 1% tolerance Resistor", Manufacturer_Name=Vishay, Mouser Part Number=71-TNPW12065K00BEEN, Datasheet Link=https://www.mouser.co.uk/ProductDetail/Vishay-Dale/TNPW12065K00BEEN/?qs=jYh4YNbhoK0CHBzi35%2Fb3A%3D%3D, Height=0.65mm, Manufacturer_Part_Number=TNPW12065K00BEEN, Mouser Price/Stock=https://www.mouser.co.uk/ProductDetail/Vishay-Dale/TNPW12065K00BEEN/?qs=jYh4YNbhoK0CHBzi35%2Fb3A%3D%3D
R6: library part TNPW12065K00BEEN, "4.7K 1% tolerance  Resistor", Manufacturer_Name=Vishay, Mouser Part Number=71-TNPW12065K00BEEN, Datasheet Link=https://www.mouser.co.uk/ProductDetail/Vishay-Dale/TNPW12065K00BEEN/?qs=jYh4YNbhoK0CHBzi35%2Fb3A%3D%3D, Height=0.65mm, Manufacturer_Part_Number=TNPW12065K00BEEN, Mouser Price/Stock=https://www.mouser.co.uk/ProductDetail/Vishay-Dale/TNPW12065K00BEEN/?qs=jYh4YNbhoK0CHBzi35%2Fb3A%3D%3D
R8: library part TNPW12065K00BEEN, "4.7K 1% tolerance Resistor", Manufacturer_Name=Vishay, Mouser Part Number=71-TNPW12065K00BEEN, Datasheet Link=https://www.mouser.co.uk/ProductDetail/Vishay-Dale/TNPW12065K00BEEN/?qs=jYh4YNbhoK0CHBzi35%2Fb3A%3D%3D, Height=0.65mm, Manufacturer_Part_Number=TNPW12065K00BEEN, Mouser Price/Stock=https://www.mouser.co.uk/ProductDetail/Vishay-Dale/TNPW12065K00BEEN/?qs=jYh4YNbhoK0CHBzi35%2Fb3A%3D%3D
R9: library part CMP1206-FX-1001ELF, "1k 1% tolerance Resistor", Manufacturer_Name=Bourns, Mouser Part Number=652-CMP1206-FX-1001L, Datasheet Link=https://pt.mouser.com/datasheet/2/54/Bourns_CMP_Datasheet_05.28.20-1854233.pdf, Height=0.65mm, Manufacturer_Part_Number=CMP1206-FX-1001ELF, Mouser Price/Stock=https://www.mouser.co.uk/ProductDetail/Bourns/CMP1206-FX-1001ELF?qs=TiOZkKH1s2QqK9iocF6aGg%3D%3D
R10: library part TNPW12065K00BEEN, "2.2K 1% tolerance Resistor", Manufacturer_Name=Vishay, Mouser Part Number=71-TNPW12065K00BEEN, Datasheet Link=https://www.mouser.co.uk/ProductDetail/Vishay-Dale/TNPW12065K00BEEN/?qs=jYh4YNbhoK0CHBzi35%2Fb3A%3D%3D, Height=0.65mm, Manufacturer_Part_Number=TNPW12065K00BEEN, Mouser Price/Stock=https://www.mouser.co.uk/ProductDetail/Vishay-Dale/TNPW12065K00BEEN/?qs=jYh4YNbhoK0CHBzi35%2Fb3A%3D%3D
R11: library part TNPW12065K00BEEN, "220ohm 1% tolerance Resistor", Manufacturer_Name=Vishay, Mouser Part Number=71-TNPW12065K00BEEN, Datasheet Link=https://www.mouser.co.uk/ProductDetail/Vishay-Dale/TNPW12065K00BEEN/?qs=jYh4YNbhoK0CHBzi35%2Fb3A%3D%3D, Height=0.65mm, Manufacturer_Part_Number=TNPW12065K00BEEN, Mouser Price/Stock=https://www.mouser.co.uk/ProductDetail/Vishay-Dale/TNPW12065K00BEEN/?qs=jYh4YNbhoK0CHBzi35%2Fb3A%3D%3D
R13 R18: library part PHPA1206E1001BST1, "2.2K 1% tolerance Resistor", Manufacturer_Name=Vishay, Mouser Part Number=71-PHPA1206E1001BST1, Datasheet Link=https://www.vishay.com/docs/60160/phpa.pdf, Height=0.508mm, Manufacturer_Part_Number=PHPA1206E1001BST1, Mouser Price/Stock=https://www.mouser.co.uk/ProductDetail/Vishay-Thin-Film/PHPA1206E1001BST1?qs=QNEnbhJQKvai8SEWbiX%2FTw%3D%3D
R14 R17 R22: library part PHPA1206E1001BST1, "1K 1% tolerance Resistor", Manufacturer_Name=Vishay, Mouser Part Number=71-PHPA1206E1001BST1, Datasheet Link=https://www.vishay.com/docs/60160/phpa.pdf, Height=0.508mm, Manufacturer_Part_Number=PHPA1206E1001BST1, Mouser Price/Stock=https://www.mouser.co.uk/ProductDetail/Vishay-Thin-Film/PHPA1206E1001BST1?qs=QNEnbhJQKvai8SEWbiX%2FTw%3D%3D
R15: library part PHPA1206E1001BST1, "180ohm 1% tolerance Resistor", Manufacturer_Name=Vishay, Mouser Part Number=71-PHPA1206E1001BST1, Datasheet Link=https://www.vishay.com/docs/60160/phpa.pdf, Height=0.508mm, Manufacturer_Part_Number=PHPA1206E1001BST1, Mouser Price/Stock=https://www.mouser.co.uk/ProductDetail/Vishay-Thin-Film/PHPA1206E1001BST1?qs=QNEnbhJQKvai8SEWbiX%2FTw%3D%3D
R16: library part PHPA1206E1001BST1, "100ohm 1% tolerance Resistor", Manufacturer_Name=Vishay, Mouser Part Number=71-PHPA1206E1001BST1, Datasheet Link=https://www.vishay.com/docs/60160/phpa.pdf, Height=0.508mm, Manufacturer_Part_Number=PHPA1206E1001BST1, Mouser Price/Stock=https://www.mouser.co.uk/ProductDetail/Vishay-Thin-Film/PHPA1206E1001BST1?qs=QNEnbhJQKvai8SEWbiX%2FTw%3D%3D
R19 R20 R21: library part CRCW120651R0FKEAC, "51ohm 1% tolerance Resistor", Manufacturer_Name=Vishay, Mouser Part Number=71-CRCW120651R0FKEAC, Arrow Part Number=CRCW120651R0FKEAC, Arrow Price/Stock=https://www.arrow.com/en/products/crcw120651r0fkeac/vishay?region=nac, Datasheet Link=http://componentsearchengine.com/Datasheets/1/CRCW120651R0FKEAC.pdf, Height=0.6mm, Manufacturer_Part_Number=CRCW120651R0FKEAC, Mouser Price/Stock=https://www.mouser.co.uk/ProductDetail/Vishay-Dale/CRCW120651R0FKEAC?qs=E3Y5ESvWgWOS4uisdbRXsg%3D%3D
RST: library part TNPW12065K00BEEN, "2 pin Switch", Manufacturer_Name=Vishay, Mouser Part Number=71-TNPW12065K00BEEN, Datasheet Link=https://www.mouser.co.uk/ProductDetail/Vishay-Dale/TNPW12065K00BEEN/?qs=jYh4YNbhoK0CHBzi35%2Fb3A%3D%3D, Height=0.65mm, Manufacturer_Part_Number=TNPW12065K00BEEN, Mouser Price/Stock=https://www.mouser.co.uk/ProductDetail/Vishay-Dale/TNPW12065K00BEEN/?qs=jYh4YNbhoK0CHBzi35%2Fb3A%3D%3D
SW: "2 Pin switch", Manufacturer_Name=Vishay, Mouser Part Number=71-PHPA1206E1001BST1, Datasheet Link=https://www.vishay.com/docs/60160/phpa.pdf, Height=0.508mm, Manufacturer_Part_Number=PHPA1206E1001BST1, Mouser Price/Stock=https://www.mouser.co.uk/ProductDetail/Vishay-Thin-Film/PHPA1206E1001BST1?qs=QNEnbhJQKvai8SEWbiX%2FTw%3D%3D
U1: "Connector", Manufacturer_Name="TE Connectivity", Mouser Part Number=571-1-2199299-5, Arrow Part Number=1-2199299-5, Arrow Price/Stock=https://www.arrow.com/en/products/1-2199299-5/te-connectivity?region=europe, Datasheet Link=https://www.te.com/commerce/DocumentDelivery/DDEController?Action=showdoc&DocId=Customer+Drawing%7F2199299%7FA%7Fpdf%7FEnglish%7FENG_CD_2199299_A_baseFilename.pdf%7F1-2199299-5, Height=5.3mm, Manufacturer_Part_Number=1-2199299-5, Mouser Price/Stock=https://www.mouser.co.uk/ProductDetail/TE-Connectivity/1-2199299-5?qs=fK8dlpkaUMthXjoyadQV1Q%3D%3D
U2: "Module: GSM/Bluetooth; GPRS; 2G; 1800MHz, 900MHz; 85.6kbps; SMD", Package=None, Availability="In Stock", Check_prices=https://www.snapeda.com/parts/SIM800C/SIMcom+Wireless+solutions+Co.%252CLtd/view-part/?ref=eda, MF=Simcom, MP=SIM800C, Price=None, SnapEDA_Link=https://www.snapeda.com/parts/SIM800C/SIMcom+Wireless+solutions+Co.%252CLtd/view-part/?ref=snap
Z1: library part MMSZ5231C-E3-08, "Zener Diode 5.1V 500mW", Manufacturer_Name=Vishay, Mouser Part Number=78-MMSZ5231C-E3-08, Arrow Part Number=MMSZ5231C-E3-08, Arrow Price/Stock=https://www.arrow.com/en/products/mmsz5231c-e3-08/vishay, Datasheet Link=https://www.arrow.com/en/products/mmsz5231c-e3-08/vishay, Height=1.35mm, Manufacturer_Part_Number=MMSZ5231C-E3-08, Mouser Price/Stock=https://www.mouser.co.uk/ProductDetail/Vishay-Semiconductors/MMSZ5231C-E3-08?qs=S660mHfF5o35EDHKMfkp8w%3D%3D

## Free pads (board coordinates)
  round 0 hole 0.762 slot 18 at 0 deg: 8(11.684,95.504) 8(37.973,95.504)
  round 0 hole 5: 9(4.318,4.953) 9(4.318,90.551) 9(48.387,4.953)

## Via types
v1: diameter 1, hole 0.5, Top Layer to Bottom Layer, 68 vias

## Nets (pads, with @x,y where several pads share a name; then routed paths per layer and width w, separated by ;. In a path a pad name is that pad's centre, name@x,y a point inside that pad or via, vN(x,y) a via of type N, cw(c..) or ccw(c..) an arc to the next point about the centre after c; other vN are vias at no path point)
4V: C9.1 C10.1 C11.1 C12.2 C13.2 C14.2 L1.1 R13.1 U2.34 U2.35 Z1.1 | length 122.3
  Top Layer w0.254: L1.1 14.779,85.725 v1(22.225,85.725) ; v1(19.304,100.457) 19.304,99.441 20.066,98.679 24.892,98.679 26.416,97.155 26.416,92.202 25.273,91.059 21.717,91.059 20.955,90.297 20.955,86.995 v1(22.225,85.725) ; Z1.1 22.987,116.46 v1(22.987,117.983) ; v1(26.594,122.504) 28.146,122.504 C14.2 C13.2 C12.2 36.534,122.552 C11.1@37.209,123.227 ; C11.1 37.592,123.61 C11.1@37.209,123.227 ; U2.34 U2.35 C11.1@37.209,123.227 ; v1(40.259,73.152) 38.608,74.803 30.504,74.803 22.225,83.082 v1(22.225,85.725)
  Bottom Layer w0.254: v1(19.304,100.457) 21.844,102.997 21.844,114.3 22.987,115.443 v1(22.987,117.983) 23.13,118.126 23.13,119.142 26.492,122.504 v1(26.594,122.504) ; C9.1 20.441,83.941 v1(22.225,85.725) v1@22.225,85.927 ; v1(40.259,73.152) 40.259,71.354 R13.1 40.516,71.097 C10.1
5V: "16x2 LCD.2" "16x2 LCD.15" C1.1 C2.1 C3.1 C7.1 C8.1 D1.1 IC1.1 Opt-F.4 Opt-H.4 OUT+.1 R3.1 RST.1 U1.10 U1.30 | length 248.5
  Top Layer w0.254: v1(1.905,56.134) 1.905,34.163 3.683,32.385 3.937,32.385 2.032,30.48 2.032,18.076 2.33,17.779 10.542,17.779 13.97,14.351 Opt-H.4 ; v1(5.08,63.627) 8.763,67.31 OUT+.1 ; 6.477,50.165 6.477,55.17 7.112,55.805 v1(7.112,56.007) ; Opt-F.4 34.985,15.875 39.498,11.362 40.876,11.362 D1.1 ; v1(37.211,56.388) 37.211,53.667 U1.10 34.386,50.25 35.268,50.25 C2.1 ; v1(37.211,60.452) 37.211,62.23 41.14,66.159 41.14,73.517 41.021,73.636 v1(41.021,78.105) RST.1
  Bottom Layer w0.254: v1(1.905,56.134) 1.968,56.07 7.048,56.07 v1(7.112,56.007) ; v1(5.08,63.627) 7.112,61.595 v1(7.112,56.007) ; OUT+.1 12.065,72.136 5.334,78.867 5.334,85.598 9.779,90.043 C8.1 ; Opt-H.4 16.291,14.259 14.894,14.259 14.478,13.843 14.478,10.668 16.248,8.898 21.272,8.898 22.4,10.025 27.424,10.025 33.274,15.875 Opt-F.4 ; R3.1 37.211,62.304 37.211,58.169 C7.1 37.211,58.163 v1(37.211,56.388) ; C1.1 37.235,49.855 36.787,50.303 34.333,50.303 U1.10 32.385,50.546 27.94,54.991 8.128,54.991 v1(7.112,56.007) ; IC1.1 39.214,78.503 39.612,78.105 v1(41.021,78.105) ; C2.1 43.989,47.879 C3.1@45.315,49.205 ; C3.1 C3.1@45.315,49.205 ; U1.30 46.514,48.006 C3.1@45.315,49.205
12V: 12V.1 IN+.1 SIREN.2 | length 49
  Top Layer w0.254: SIREN.2 4.02,21.673 4.655,21.673 IN+.1 ; v1(22.987,9.144) 23.13,9.001 23.765,9.001 12V.1
  Bottom Layer w0.254: SIREN.2 3.81,19.431 6.477,16.764 11.132,16.764 11.43,16.466 11.43,11.811 15.621,7.62 21.463,7.62 v1(22.987,9.144)
BVM: R3.2 R4.1 U1.35 | length 12.3
  Bottom Layer w0.254: R3.2 41.653,62.357 R4.1@45.519,58.491 ; R4.1 R4.1@45.519,58.491 ; U1.35 47.763,58.939 45.967,58.939 R4.1@45.519,58.491
C1: KeyPad.4 U1.8 | length 40.7
  Bottom Layer w0.254: KeyPad.4 5.08,70.485 7.112,68.453 7.112,63.754 14.097,56.769 32.947,56.769 U1.8
C2: KeyPad.3 U1.7 | length 40.8
  Bottom Layer w0.254: KeyPad.3 4.699,73.025 8.128,69.596 8.128,64.77 14.732,58.166 U1.7
C3: KeyPad.2 U1.6 | length 41.2
  Bottom Layer w0.254: KeyPad.2 4.318,75.565 9.144,70.739 9.144,65.278 12.827,61.595 33.019,61.595 33.908,60.706 U1.6
C4: KeyPad.1 U1.5 | length 42
  Bottom Layer w0.254: KeyPad.1 3.81,78.105 10.287,71.628 10.287,65.576 13.252,62.611 33.037,62.611 33.672,63.246 U1.5
FPA2: Opt-F.3 R6.1 U1.38 | length 68.5
  Top Layer w0.254: R6.1 30.734,10.739 33.33,13.335 Opt-F.3 ; v1(47.625,22.86) 47.625,66.421 U1.38
  Bottom Layer w0.254: Opt-F.3 38.1,13.335 v1(47.625,22.86)
GND: 3.7V.2 12V.2 "16x2 LCD.1" "16x2 LCD.5" ANT.1 ANT.2 C1.2 C2.2 C3.2 C4.2 C5.2 C6.2 C7.2 C8.2 C9.2 C10.2 C11.2 C12.1 C13.1 C14.1 C15.2 C16.2 C17.2 Card.5 D2.2 D3.2 D.2 FIRE.2 HOOTER.2 IC1.3 IC1.6 IN-.1 LED2.1 Opt-F.2 Opt-H.2 OUT-.1 Q.1 R1.2 R2.2 R4.2 R6.2 R8.2 R10.2 R11.2 R14.2 R18.2 SW.2 U1.11 U1.31 U2.8 U2.13 U2.19 U2.21 U2.27 U2.30 U2.31 U2.33 U2.36 U2.37 Z1.2 | length 571.1
  Top Layer w0.254: v1(5.461,118.745) 5.461,118.709 6.096,118.074 6.096,114.427 8.001,112.522 13.081,112.522 14.986,114.427 v1(14.986,116.332) Z1.2 19.559,117.782 20.066,118.289 v1(20.066,118.491) ; Card.5 5.899,100.641 6.197,100.343 17.944,100.343 20.392,102.791 20.981,102.791 21.317,103.127 C15.2 ; 6.477,32.385 9.271,32.385 10.287,33.401 v1(10.287,36.449) 10.287,58.596 9.989,58.893 9.391,58.893 8.943,59.341 R11.2 ; Q.1 10.795,19.939 14.605,16.129 18.613,16.129 19.304,15.438 19.304,14.471 19.629,14.146 19.629,14.023 22.214,16.608 22.214,17.66 22.662,18.108 R10.2 R10.2@23.312,18.108 ; v1(23.241,89.154) 27.051,89.154 v1(27.94,90.043) ; LED2.1 25.276,126.365 v1(26.289,125.352) C14.1 C13.1 C12.1 ; v1(25.273,9.017) 25.273,9.219 25.781,9.727 Opt-F.2 ; U2.8 24.047,108.459 23.495,107.907 23.495,105.835 23.197,105.537 SW.2 C15.2 ; v1(27.559,93.853) 27.566,93.86 27.566,96.781 28.217,97.432 35.71,97.432 v1(37.465,99.187) ; R6.2 27.834,10.739 26.834,11.739 26.834,12.282 Opt-F.2 ; IN-.1 26.289,25.019 v1(26.289,22.606) 26.146,22.463 26.146,21.958 23.76,19.572 23.76,18.556 R10.2@23.312,18.108 ; v1(35.433,120.65) 35.433,120.448 35.075,120.09 35.075,119.075 U2.37 U2.36 ; U2.21 38.243,101.143 38.243,99.858 37.572,99.187 v1(37.465,99.187) ; C2.2 38.989,26.289 v1(42.291,22.987) ; 3.7V.2 44.855,8.057 C6.2 C5.2 ; v1(41.275,58.166) 43.18,60.071 43.18,62.992 v1(43.053,63.119) ; U2.27 41.88,109.58 45.445,109.58 v1(45.466,109.601) ; U2.30 U2.31 42.553,113.959 42.925,113.587 ANT.2 46.507,113.563 46.531,113.538 v1(48.514,113.538) ; U2.33 41.925,116.225 42.619,116.225 42.931,116.537 ANT.1 ; v1(42.799,82.931) 42.799,81.227 R2.2 ; C11.2 v1(45.974,124.333) ; ANT.1@46.531,116.586 v1(48.514,116.586) ; C15.2 21.914,102.93 23.181,102.93 24.902,101.209 U2.13 29.509,102.915 30.099,103.505 35.56,103.505 36.102,102.963 36.102,101.216 U2.19 36.175,101.143 36.175,99.969 36.814,99.33 37.322,99.33 v1(37.465,99.187) ; R10.2@23.312,18.108 27.231,18.108 27.813,17.526 27.813,13.633 27.515,13.335 Opt-F.2
  Bottom Layer w0.254: v1(5.461,118.745) 5.461,116.97 C16.2 5.458,113.775 R18.2 ; 6.477,32.385 8.382,30.48 8.382,24.003 Q.1 ; 6.477,37.465 9.271,37.465 v1(10.287,36.449) ; Opt-H.2 13.462,7.112 HOOTER.2 15.367,5.715 21.844,5.715 22.474,5.085 22.474,3.942 FIRE.2 25.273,6.477 v1(25.273,9.017) ; D3.2 11.598,105.197 11.623,105.197 13.937,107.511 13.937,107.536 15.344,108.943 C17.2@16.471,108.943 ; C9.2 14.341,81.28 18.063,85.002 C8.2 22.166,90.043 23.055,89.154 v1(23.241,89.154) ; D.2 13.555,116.395 14.922,116.395 v1(14.986,116.332) 14.986,110.848 16.083,109.751 16.083,109.331 C17.2@16.471,108.943 ; v1(16.764,107.696) 16.764,108.816 C17.2 C17.2@16.471,108.943 ; v1(20.066,118.491) 26.146,124.571 26.146,125.209 v1(26.289,125.352) 30.731,125.352 v1(35.433,120.65) 39.116,124.333 v1(45.974,124.333) 47.879,124.333 48.514,123.698 v1(48.514,116.586) v1(48.514,113.538) 48.514,110.998 47.117,109.601 v1(45.466,109.601) 45.466,104.14 40.513,99.187 v1(37.465,99.187) ; v1(26.289,22.606) 27.299,21.596 33.078,21.596 34.469,22.987 v1(42.291,22.987) ; v1(27.94,90.043) 27.94,93.27 27.559,93.651 v1(27.559,93.853) 29.255,92.157 32.516,92.157 IC1.6 ; OUT-.1 30.353,73.914 30.861,74.422 ; 12V.2 31.496,5.715 32.004,6.223 39.497,6.223 40.481,5.239 3.7V.2 ; U1.11 34.111,47.985 35.581,47.985 37.846,45.72 37.846,42.672 C2.2 38.989,47.959 40.235,49.205 C1.2 ; IC1.3 IC1.6 ; C7.2 v1(41.275,58.166) R4.2 42.315,57.862 C4.2 R1.2 40.058,49.707 C1.2 ; v1(42.799,82.931) 42.799,88.828 R14.2@44.121,90.15 ; R14.2 R14.2@44.121,90.15 ; D2.2@44.663,64.135 D2.2 44.745,63.119 v1(43.053,63.119) 42.037,64.135 40.383,64.135 38.499,66.019 38.099,66.019 37.716,66.402 C10.2 37.716,67.202 36.068,68.85 36.068,74.549 35.56,75.057 31.496,75.057 30.861,74.422 ; U1.31 49.265,50.811 46.042,50.811 45.418,51.435 42.613,51.435 42.315,51.137 C3.2 C1.2 ; 30.861,74.422 30.861,85.561 34.159,88.859 IC1.6 ; IC1.6 37.105,90.15 R14.2@44.121,90.15
HPA1: Opt-H.3 R8.1 U1.39 | length 90.6
  Top Layer w0.254: Opt-H.3 16.639,11.811 17.327,11.123 R8.1 v1(19.304,9.779) ; v1(45.847,22.86) 46.736,23.749 46.736,68.072 U1.39
  Bottom Layer w0.254: v1(19.304,9.779) 19.304,17.526 21.463,19.685 42.672,19.685 v1(45.847,22.86)
LED: LED1.A U1.40 | length 11.3
  Bottom Layer w0.254: LED1.A 48.895,84.033 49.53,83.398 U1.40
Net3.7V_1: 3.7V.1 D1.2 | length 7.2
  Top Layer w0.254: D1.2 37.424,4.74 3.7V.1
"Net16x2 LCD_3": "16x2 LCD.3" R10.1 | length 28
  Top Layer w0.254: v1(22.352,22.352) 22.352,21.456 22.8,21.008 R10.1
  Bottom Layer w0.254: 6.477,34.925 18.669,34.925 22.352,31.242 v1(22.352,22.352)
"Net16x2 LCD_16": "16x2 LCD.16" R11.1 | length 10.3
  Top Layer w0.254: 3.937,50.165 3.937,57.132 6.043,59.238 R11.1
NetANT_3: ANT.3 U2.32 | length 3.1
  Top Layer w0.254: U2.32 44.929,115.059 ANT.3
NetC4_1: C4.1 U1.32 | length 4.5
  Bottom Layer w0.254: C4.1 48.35,53.848 49.112,53.086 U1.32
NetC15_1: C15.1 U2.28 | length 28.9
  Top Layer w0.254: C15.1 22.1,100.71 23.038,100.71 23.293,100.965 v1(23.495,100.965) ; U2.28 41.901,110.701 44.026,110.701 v1(44.069,110.744)
  Bottom Layer w0.254: v1(23.495,100.965) 33.274,110.744 v1(44.069,110.744)
NetCard_2: Card.2 D.4 R19.2 | length 18.5
  Top Layer w0.254: Card.2 8.439,121.032 10.287,119.184 v1(10.287,114.046)
  Bottom Layer w0.254: D.4 10.892,114.651 v1(10.287,114.046) 10.287,114.028 11.038,113.277 11.244,113.277 11.642,112.879 R19.2
NetCard_3: Card.3 D.6 R20.2 | length 11.5
  Top Layer w0.254: Card.3 10.979,124.322 11.938,123.363 v1(11.938,123.317)
  Bottom Layer w0.254: D.6 10.892,120.469 R20.2 11.938,121.563 v1(11.938,123.317)
NetCard_7: Card.7 D.1 R21.1 | length 28.6
  Top Layer w0.254: Card.7 18.252,102.388 18.734,102.87 v1(18.923,102.87)
  Bottom Layer w0.254: D.1 16.849,117.409 R21.1 16.961,117.381 18.382,117.381 19.812,115.951 19.812,103.871 18.923,102.982 v1(18.923,102.87)
NetD2_1: D2.1 IC1.2 L1.2 | length 58.4
  Top Layer w0.254: L1.2 8.636,84.709 6.604,82.677 6.604,77.216 8.255,75.565 v1(27.686,75.565) ; v1(29.845,77.851) 30.988,77.851 33.393,75.446 35.09,75.446 35.844,76.2 v1(37.465,76.2)
  Bottom Layer w0.254: v1(27.686,75.565) 27.686,75.629 29.845,77.787 v1(29.845,77.851) ; IC1.2 37.465,78.46 v1(37.465,76.2) 41.402,76.2 44.577,73.025 D2.1@44.577,67.691
NetD3_1: D3.1 R16.2 SW.1 | length 9.5
  Top Layer w0.254: v1(17.907,105.664) 17.934,105.691 19.296,105.691 21.642,108.037 SW.1 R16.2
  Bottom Layer w0.254: D3.1 16.465,105.664 v1(17.907,105.664)
NetFIRE_1: FIRE.1 R5.1 | length 8.7
  Top Layer w0.254: FIRE.1 20.066,8.654 22.535,11.123 R5.1
NetHOOTER_1: HOOTER.1 R7.1 | length 10.2
  Top Layer w0.254: R7.1 5.461,9.271 HOOTER.1
NetIC1_4: IC1.4 R13.2 R14.1 | length 25.2
  Top Layer w0.254: v1(34.163,76.327) 34.29,76.327 44.069,86.106 v1(44.196,86.106)
  Bottom Layer w0.254: IC1.4 34.163,78.46 v1(34.163,76.327) 34.306,76.184 35.576,76.184 37.084,74.676 37.084,72.293 37.193,72.184 37.193,71.995 37.866,71.322 R13.2 ; v1(44.196,86.106) R14.1
NetLED1_C: LED1.C R2.1 | length 7.1
  Top Layer w0.254: R2.1 45.773,83.873 LED1.C
NetLED2_2: LED2.2 R15.1 | length 5
  Top Layer w0.254: LED2.2 20.725,122.043 R15.1
NetOpt-F_1: Opt-F.1 R5.2 | length 3.7
  Top Layer w0.254: R5.2 23.185,14.023 24.564,15.402 25.308,15.402 Opt-F.1
NetOpt-H_1: Opt-H.1 R7.2 | length 3.4
  Top Layer w0.254: R7.2 8.456,14.658 Opt-H.1
NetQ_2: Q.2 SIREN.1 | length 14.4
  Bottom Layer w0.254: SIREN.1 6.255,23.463 6.858,22.86 6.858,20.193 7.874,19.177 12.065,19.177 13.003,20.115 13.003,21.508 Q.2
NetQ_3: Q.3 R9.2 | length 4.2
  Top Layer w0.254: Q.3 18.676,21.59 19.131,21.135 R9.2
NetR1_1: R1.1 RST.2 U1.9 | length 33.2
  Top Layer w0.254: U1.9 36.068,55.064 36.068,57.658 45.773,67.363 RST.2
  Bottom Layer w0.254: U1.9 34.508,53.086 35.27,53.848 R1.1
NetR15_2: R15.2 U2.41 | length 8.8
  Top Layer w0.254: R15.2 24.11,121.158 29.972,121.158 30.609,120.521 U2.41
NetR16_1: R16.1 U2.39 | length 16.3
  Top Layer w0.254: R16.1 21.804,113.03 v1(23.368,113.03) ; v1(32.766,120.904) 32.787,120.883 32.787,119.031 U2.39
  Bottom Layer w0.254: v1(23.368,113.03) 24.892,113.03 v1(32.766,120.904)
NetR17_2: R17.2 R18.1 U2.2 | length 24.5
  Top Layer w0.254: v1(7.493,110.871) 14.671,110.871 18.608,114.808 25.014,114.808 25.265,115.059 U2.2
  Bottom Layer w0.254: R17.2 R18.1 5.862,110.871 v1(7.493,110.871)
NetR22_1: R22.1 U2.1 | length 20.5
  Top Layer w0.254: v1(9.906,121.666) 11.938,119.634 23.114,119.634 25.105,117.643 25.105,116.507 25.453,116.159 U2.1
  Bottom Layer w0.254: R22.1 v1(9.906,121.666)
PD0: "16x2 LCD.4" U1.16 | length 61.5
  Bottom Layer w0.254: 3.937,34.925 2.159,34.925 0.762,36.322 0.762,52.451 2.159,53.848 15.548,53.848 U1.16
PD1: "16x2 LCD.6" U1.17 | length 58
  Bottom Layer w0.254: 3.937,37.465 2.413,37.465 1.27,38.608 1.27,51.689 2.667,53.086 13.77,53.086 U1.17
PD2: "16x2 LCD.11" U1.18 | length 47.2
  Top Layer w0.254: v1(28.448,22.477) 28.448,22.679 32.385,26.616 32.385,29.822 32.683,30.119 33.983,30.119 U1.18
  Bottom Layer w0.254: 6.477,45.085 14.351,45.085 26.162,33.274 26.162,26.289 28.305,24.146 28.305,22.62 v1(28.448,22.477)
PD3: "16x2 LCD.12" U1.19 | length 52.7
  Bottom Layer w0.254: 3.937,45.085 3.914,45.108 2.076,45.108 1.778,45.405 1.778,51.181 2.921,52.324 12.192,52.324 32.385,32.131 32.385,29.337 34.036,27.686 U1.19
PD4: "16x2 LCD.13" U1.20 | length 43.7
  Top Layer w0.254: v1(30.48,22.606) 30.623,22.749 31.693,22.749 U1.20
  Bottom Layer w0.254: 6.477,47.625 13.462,47.625 27.432,33.655 27.432,26.67 30.48,23.622 v1(30.48,22.606)
PD5: "16x2 LCD.14" U1.21 | length 68.2
  Bottom Layer w0.254: 3.937,47.625 3.649,47.913 2.711,47.913 2.413,48.21 2.413,50.927 3.175,51.689 11.176,51.689 28.702,34.163 28.702,26.924 31.761,23.865 40.005,23.865 40.008,23.868 48.252,23.868 U1.21
R1: KeyPad.8 U1.4 | length 34.1
  Top Layer w0.254: KeyPad.8 2.704,60.325 3.212,60.833 4.191,60.833 8.509,65.151 33.037,65.151 33.672,65.786 U1.4
R2: KeyPad.7 U1.3 | length 35.5
  Top Layer w0.254: KeyPad.7 5.279,65.858 6.065,65.858 8.763,68.556 8.763,69.215 9.144,69.596 32.82,69.596 U1.3
R3: KeyPad.6 U1.2 | length 35.8
  Top Layer w0.254: KeyPad.6 2.408,65.527 3.678,65.527 7.366,69.215 7.366,71.203 7.664,71.501 33.037,71.501 33.672,70.866 U1.2
R4: KeyPad.5 U1.1 | length 35.6
  Top Layer w0.254: KeyPad.5 2.345,68.004 3.742,68.004 5.842,70.104 5.842,72.771 6.477,73.406 U1.1
RXD: R17.1 U1.15 | length 90.9
  Top Layer w0.254: v1(5.588,97.917) 6.985,97.917 7.239,97.663 22.606,97.663 24.646,95.623 24.646,92.845 v1(24.511,92.71) ; v1(23.749,64.135) 23.749,48.187 U1.15
  Bottom Layer w0.254: v1(5.588,97.917) 5.588,105.938 R17.1 ; v1(23.749,64.135) 23.749,77.059 24.765,78.075 24.765,85.482 24.511,85.736 v1(24.511,92.71)
"SM CLK": R20.1 U2.16 | length 44